# Altium PCB DC_AC_Inverter.PcbDoc (part 2 of 4)
Units mil, origin at the board's own origin, x right, y up, seen from the top; angles counter-clockwise.
Board outline 6496.06 x 4566.93 mil, 6 copper layers (L1, L2, L3, L4, L5, L6), stack 22.312 mil thick; 133 components, 65 nets, 349 pads, 134 vias.
Unrouted connection lines stored in the file: 226.
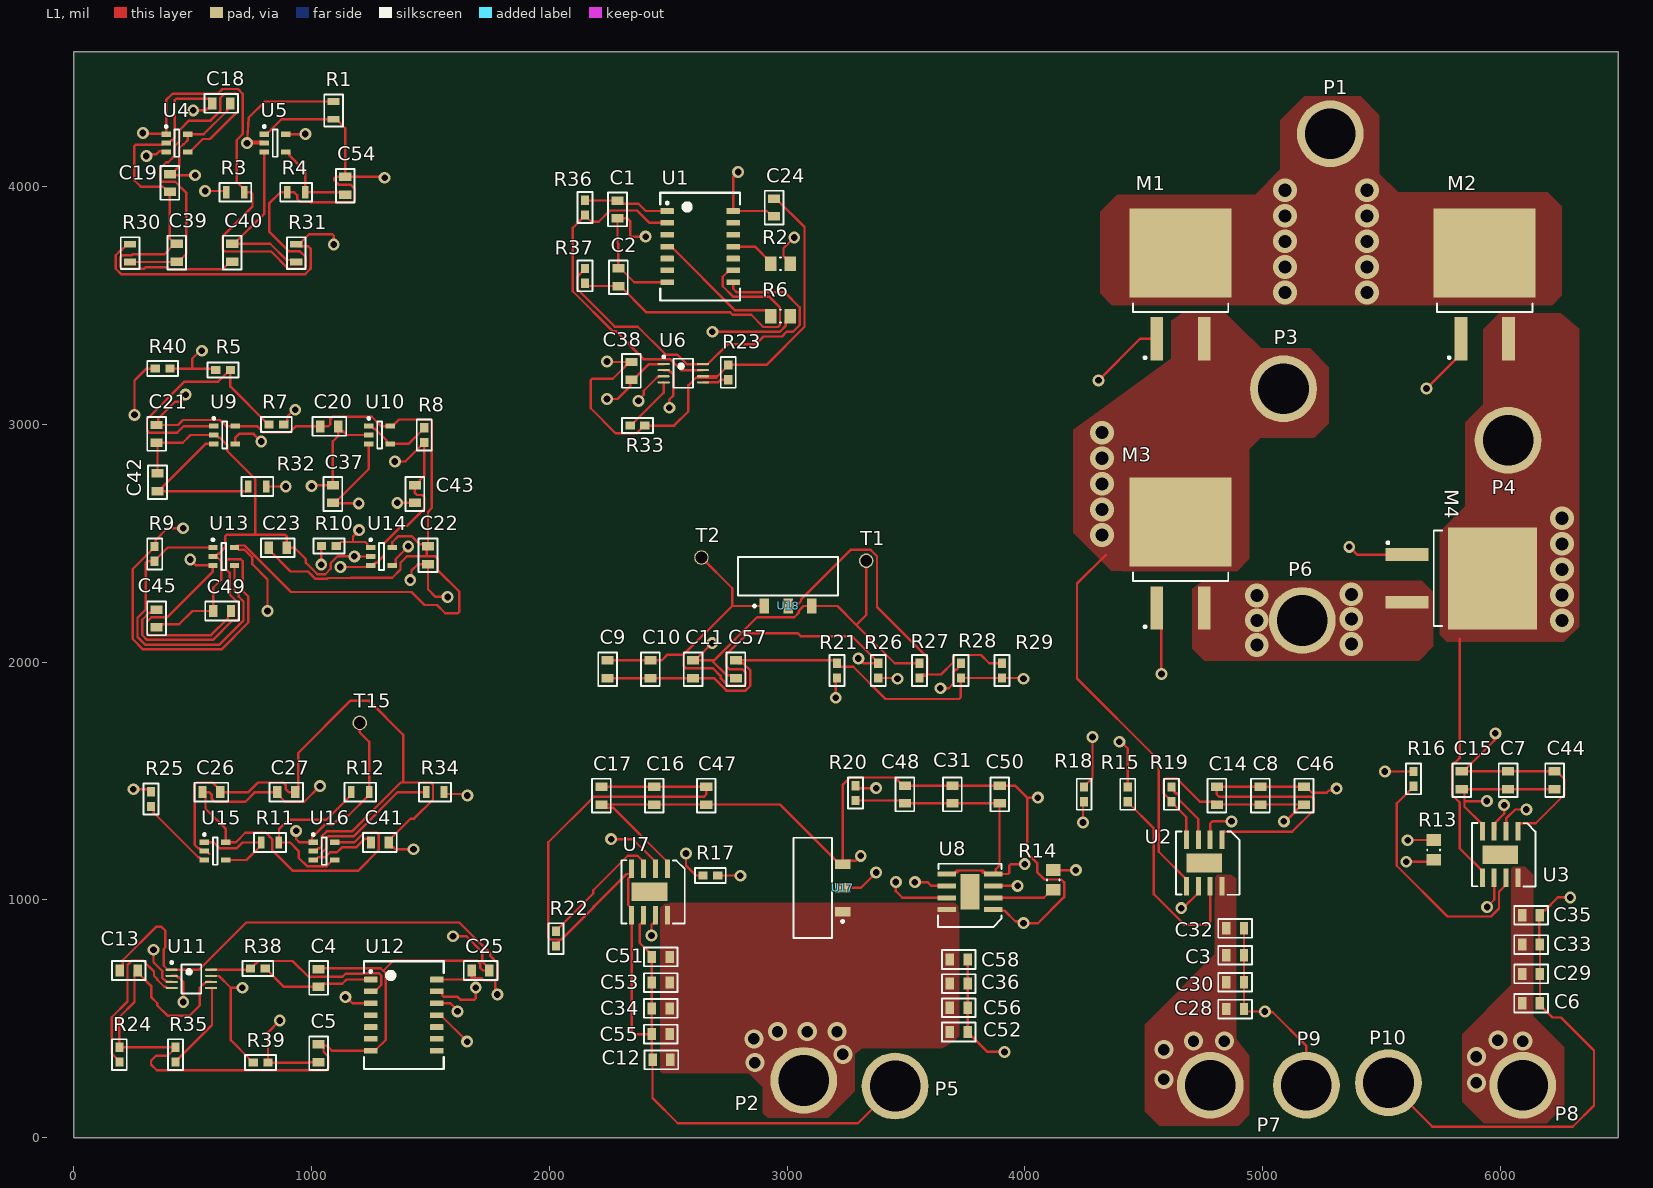
[diagram p0: L1 view]

## Part data (continued)
C10 C12 C57: library part CL10A106MA8NRNC, "25V 10uF X5R ±20% 0603 Multilayer Ceramic Capacitors MLCC - SMD/SMT ROHS", Case Code (Imperial)=0603, Case Code (Metric)=1608, Dielectric=X5R, Dielectric Material=Ceramic, Manufacturer="Samsung Electro-Mechanics", Max Operating Temperature=85°C, Min Operating Temperature=-55°C, Supplier Part Number=1276-1869-1-ND, Tolerance=20%, Voltage Rating=25V, Case/Package=0603, Category="Ceramic Capacitors", China RoHS=Compliant, ComponentLink1Description=https://datasheet.octopart.com:443/CL10A106MA8NRNC-Samsung-Electro-Mechanics-datasheet-182019172.pdf?src-supplier=IHS, ComponentLink1URL=https://datasheet.octopart.com:443/CL10A106MA8NRNC-Samsung-Electro-Mechanics-datasheet-182019172.pdf?src-supplier=IHS, ComponentLink2Description=https://datasheet.octopart.com:443/CL10A106MA8NRNC-Samsung-Electro-Mechanics-datasheet-137745063.pdf?src-supplier=Future+Electronics, ComponentLink2URL=https://datasheet.octopart.com:443/CL10A106MA8NRNC-Samsung-Electro-Mechanics-datasheet-137745063.pdf?src-supplier=Future+Electronics, ComponentLink3Description=https://datasheet.octopart.com:443/CL10A106MA8NRNC-Samsung-Electro-Mechanics-datasheet-136031756.pdf?src-supplier=Future+Electronics, ComponentLink3URL=https://datasheet.octopart.com:443/CL10A106MA8NRNC-Samsung-Electro-Mechanics-datasheet-136031756.pdf?src-supplier=Future+Electronics, ComponentLink4Description=https://datasheet.octopart.com:443/CL10A106MA8NRNC-Samsung-Electro-Mechanics-datasheet-110226291.pdf?src-supplier=Future+Electronics, ComponentLink4URL=https://datasheet.octopart.com:443/CL10A106MA8NRNC-Samsung-Electro-Mechanics-datasheet-110226291.pdf?src-supplier=Future+Electronics, ComponentLink5Description=https://datasheet.octopart.com:443/CL10A106MA8NRNC-Samsung-Electro-Mechanics-datasheet-87580073.pdf?src-supplier=Future+Electronics, ComponentLink5URL=https://datasheet.octopart.com:443/CL10A106MA8NRNC-Samsung-Electro-Mechanics-datasheet-87580073.pdf?src-supplier=Future+Electronics, ComponentLink6Description=https://datasheet.octopart.com:443/CL10A106MA8NRNC-Samsung-Electro-Mechanics-datasheet-68300265.pdf?src-supplier=Future+Electronics, ComponentLink6URL=https://datasheet.octopart.com:443/CL10A106MA8NRNC-Samsung-Electro-Mechanics-datasheet-68300265.pdf?src-supplier=Future+Electronics, ComponentLink7Description=https://datasheet.octopart.com:443/CL10A106MA8NRNC-Samsung-datasheet-66660282.pdf?src-supplier=Future+Electronics, ComponentLink7URL=https://datasheet.octopart.com:443/CL10A106MA8NRNC-Samsung-datasheet-66660282.pdf?src-supplier=Future+Electronics, ComponentLink8Description=https://datasheet.octopart.com:443/CL10A106MA8NRNC-Samsung-datasheet-48647236.pdf?src-supplier=Future+Electronics, ComponentLink8URL=https://datasheet.octopart.com:443/CL10A106MA8NRNC-Samsung-datasheet-48647236.pdf?src-supplier=Future+Electronics, ComponentLink9Description=https://datasheet.octopart.com:443/CL10A106MA8NRNC-Samsung-datasheet-39118733.pdf?src-supplier=Future+Electronics, ComponentLink9URL=https://datasheet.octopart.com:443/CL10A106MA8NRNC-Samsung-datasheet-39118733.pdf?src-supplier=Future+Electronics, ComponentLink10Description=https://datasheet.octopart.com:443/CL10A106MA8NRNC-Samsung-Electro-Mechanics-datasheet-149156483.pdf?src-supplier=Future+Electronics, ComponentLink10URL=https://datasheet.octopart.com:443/CL10A106MA8NRNC-Samsung-Electro-Mechanics-datasheet-149156483.pdf?src-supplier=Future+Electronics, Contact Plating=Tin, Country of Origin="Mainland China, Philippines, South Korea", Export Control Classification Number (ECCN) Code=EAR99, Harmonized Tariff Schedule (HTS) Code=8532.24.00.20, Height=800µm, Introduction Date=2013-01-16, Lead Free="Lead Free", Length=1.6mm, Lifecycle Status=Production, Manufacturer Part Number=CL10A106MA8NRNC, Material=Ceramic, Mounting Technology="Surface Mount", Number of Terminals=2, Packaging="Tape & Reel (TR)", Pricing="1=0.09, 10=0.045 (USD)", REACH SVHC=Yes, RoHS=Compliant, Schedule B="8532240020, 8532240020|8532240020|8532240020|8532240020|8532240020|8532240020|8532240020|8532240020|8532240020|8532240020|8532240020, 8532240020|8532240020|8532240020|8532240020|8532240020|8532240020|8532240020|8532240020|8532240020|8532240020|8532240020|8532240020, 8532240020|8532240020|8532240020|8532240020|8532240020|8532240020|8532240020|8532240020|8532240020|8532240020|8532240020|8532240020|8532240020", Stock=819895, Supplier=DigiKey, Termination=Wraparound, Thickness=889µm, Voltage Rating (DC)=25V, Width=800µm
C13 C18 C19 C20 C21 C22 C23 C24 C25 C26 C27 C38: library part GRM155R71C103KA01D, "16V 10nF X7R ±10% 0402 Multilayer Ceramic Capacitors MLCC - SMD/SMT ROHS", Case Code (Imperial)=0402, Case Code (Metric)=1005, Dielectric=X7R, Dielectric Material=Ceramic, Manufacturer=Murata, Manufacturer Lifecycle Status=NRND, Max Operating Temperature=125°C, Min Operating Temperature=-55°C, Supplier Part Number=490-1313-2-ND, Tolerance=10%, Voltage=16V, Case/Package=0402, Category="Ceramic Capacitors", ComponentLink1Description=https://datasheet.octopart.com:443/GRM155R71C103KA01D-Murata-datasheet-8817987.pdf?src-supplier=element14+APAC, ComponentLink1URL=https://datasheet.octopart.com:443/GRM155R71C103KA01D-Murata-datasheet-8817987.pdf?src-supplier=element14+APAC, ComponentLink2Description=https://datasheet.octopart.com:443/GRM155R71C103KA01D-Murata-datasheet-62317116.pdf?src-supplier=element14+APAC, ComponentLink2URL=https://datasheet.octopart.com:443/GRM155R71C103KA01D-Murata-datasheet-62317116.pdf?src-supplier=element14+APAC, ComponentLink3Description=https://datasheet.octopart.com:443/GRM155R71C103KA01D-Murata-datasheet-12547956.pdf?src-supplier=_legacy+Avnet, ComponentLink3URL=https://datasheet.octopart.com:443/GRM155R71C103KA01D-Murata-datasheet-12547956.pdf?src-supplier=_legacy+Avnet, ComponentLink4Description=https://datasheet.octopart.com:443/GRM155R71C103KA01D-Murata-datasheet-8330587.pdf?src-supplier=_legacy+Avnet, ComponentLink4URL=https://datasheet.octopart.com:443/GRM155R71C103KA01D-Murata-datasheet-8330587.pdf?src-supplier=_legacy+Avnet, ComponentLink5Description=https://datasheet.octopart.com:443/GRM155R71C103KA01D-Murata-datasheet-165579666.pdf?src-supplier=TME, ComponentLink5URL=https://datasheet.octopart.com:443/GRM155R71C103KA01D-Murata-datasheet-165579666.pdf?src-supplier=TME, ComponentLink6Description=https://datasheet.octopart.com:443/GRM155R71C103KA01D-Murata-datasheet-59876780.pdf?src-supplier=TME, ComponentLink6URL=https://datasheet.octopart.com:443/GRM155R71C103KA01D-Murata-datasheet-59876780.pdf?src-supplier=TME, ComponentLink7Description=https://datasheet.octopart.com:443/GRM155R71C103KA01D-Murata-datasheet-141266224.pdf?src-supplier=Ciiva, ComponentLink7URL=https://datasheet.octopart.com:443/GRM155R71C103KA01D-Murata-datasheet-141266224.pdf?src-supplier=Ciiva, ComponentLink8Description=https://datasheet.octopart.com:443/GRM155R71C103KA01D-Murata-datasheet-140690969.pdf?src-supplier=Ciiva, ComponentLink8URL=https://datasheet.octopart.com:443/GRM155R71C103KA01D-Murata-datasheet-140690969.pdf?src-supplier=Ciiva, ComponentLink9Description=https://datasheet.octopart.com:443/GRM155R71C103KA01D-Murata-datasheet-138740887.pdf?src-supplier=Ciiva, ComponentLink9URL=https://datasheet.octopart.com:443/GRM155R71C103KA01D-Murata-datasheet-138740887.pdf?src-supplier=Ciiva, ComponentLink10Description=https://datasheet.octopart.com:443/GRM155R71C103KA01D-Murata-datasheet-22122223.pdf?src-supplier=Future+Electronics, ComponentLink10URL=https://datasheet.octopart.com:443/GRM155R71C103KA01D-Murata-datasheet-22122223.pdf?src-supplier=Future+Electronics, ComponentLink11Description=https://datasheet.octopart.com:443/GRM155R71C103KA01D-Murata-datasheet-14400559.pdf?src-supplier=Future+Electronics, ComponentLink11URL=https://datasheet.octopart.com:443/GRM155R71C103KA01D-Murata-datasheet-14400559.pdf?src-supplier=Future+Electronics, ComponentLink12Description=https://datasheet.octopart.com:443/GRM155R71C103KA01D-Murata-datasheet-44106282.pdf?src-supplier=Future+Electronics, ComponentLink12URL=https://datasheet.octopart.com:443/GRM155R71C103KA01D-Murata-datasheet-44106282.pdf?src-supplier=Future+Electronics, ComponentLink13Description=https://datasheet.octopart.com/GRM155R71C103KA01D-Murata-datasheet-12515295.pdf, ComponentLink13URL=https://datasheet.octopart.com/GRM155R71C103KA01D-Murata-datasheet-12515295.pdf, ComponentLink14Description=https://datasheet.octopart.com/GRM155R71C103KA01D-Murata-datasheet-12510076.pdf, ComponentLink14URL=https://datasheet.octopart.com/GRM155R71C103KA01D-Murata-datasheet-12510076.pdf, ComponentLink15Description=https://datasheet.octopart.com/GRM155R71C103KA01D-Murata-datasheet-11978611.pdf, ComponentLink15URL=https://datasheet.octopart.com/GRM155R71C103KA01D-Murata-datasheet-11978611.pdf, ComponentLink16Description=https://datasheet.octopart.com/GRM155R71C103KA01D-Murata-datasheet-10025737.pdf, ComponentLink16URL=https://datasheet.octopart.com/GRM155R71C103KA01D-Murata-datasheet-10025737.pdf, ComponentLink17Description=https://datasheet.octopart.com/GRM155R71C103KA01D-Murata-datasheet-8819587.pdf, ComponentLink17URL=https://datasheet.octopart.com/GRM155R71C103KA01D-Murata-datasheet-8819587.pdf, ComponentLink18Description=https://datasheet.octopart.com/GRM155R71C103KA01D-Murata-datasheet-14400564.pdf, ComponentLink18URL=https://datasheet.octopart.com/GRM155R71C103KA01D-Murata-datasheet-14400564.pdf, ComponentLink19Description=https://datasheet.octopart.com:443/GRM155R71C103KA01D-Murata-datasheet-148211.pdf?src-supplier=Garrett, ComponentLink19URL=https://datasheet.octopart.com:443/GRM155R71C103KA01D-Murata-datasheet-148211.pdf?src-supplier=Garrett, ComponentLink20Description=https://datasheet.octopart.com:443/GRM155R71C103KA01D-Murata-datasheet-102.pdf?src-supplier=DigiKey, ComponentLink20URL=https://datasheet.octopart.com:443/GRM155R71C103KA01D-Murata-datasheet-102.pdf?src-supplier=DigiKey, ComponentLink21Description=http://sigma.octopart.com:80/reach_statement/Murata-company-16.pdf?src-supplier=Compliance+Statements, ComponentLink21URL=http://sigma.octopart.com:80/reach_statement/Murata-company-16.pdf?src-supplier=Compliance+Statements, Depth=500µm, Height=500µm, Lead Free="Lead Free", Length=1mm, Lifecycle Status=NRND, Manufacturer Part Number=GRM155R71C103KA01D, Material=Ceramic, Mounting Technology="Surface Mount", Number of Terminals=2, Packaging="Cut Tape", Pins=2, Pricing="10000=0.00545, 20000=0.00494, 30000=0.00468, 50000=0.00439, 70000=0.00423, 100000=0.00407, 120000=0.00399, 240000=0.00374, 250000=0.00372 (USD)", Radiation Hardening=No, REACH SVHC=Yes, RoHS=Compliant, Schedule B="8532240020, 8532240020|8532240020, 8532240020|8532240020|8532240020, 8532240020|8532240020|8532240020|8532240020", Stock=6720000, Supplier=DigiKey, Termination=SMD/SMT, Thickness=500µm, Voltage Rating=16V, Voltage Rating (DC)=16V, Width=500µm
C30 C33 C53 C56: library part C0603C683K5RACTU, "Ceramic Capacitor, Multilayer, Ceramic, 50V, 10% +Tol, 10% -Tol, X7R, 15% TC, 0.068uF, Surface Mount, 0603", Case Code (Imperial)=0603, Case Code (Metric)=1608, Dielectric=X7R, Dielectric Material=Ceramic, Manufacturer=KEMET, Max Operating Temperature=125°C, Min Operating Temperature=-55°C, Supplier Part Number=399-C0603C683K5RACTUCT-ND, Temperature Coefficient=30ppm/°C, Tolerance=10%, Voltage=50V, Case/Package=0603, Category="Ceramic Capacitors", China RoHS=Compliant, ComponentLink1Description=https://datasheet.octopart.com:443/C0603C683K5RACTU-KEMET-datasheet-178445679.pdf?src-supplier=IHS, ComponentLink1URL=https://datasheet.octopart.com:443/C0603C683K5RACTU-KEMET-datasheet-178445679.pdf?src-supplier=IHS, ComponentLink2Description=https://datasheet.octopart.com:443/C0603C683K5RAC7867-KEMET-datasheet-184792974.pdf?src-supplier=IHS, ComponentLink2URL=https://datasheet.octopart.com:443/C0603C683K5RAC7867-KEMET-datasheet-184792974.pdf?src-supplier=IHS, ComponentLink3Description=https://datasheet.octopart.com:443/C0603C683K5RACTU-KEMET-datasheet-137357759.pdf?src-supplier=Farnell, ComponentLink3URL=https://datasheet.octopart.com:443/C0603C683K5RACTU-KEMET-datasheet-137357759.pdf?src-supplier=Farnell, ComponentLink4Description=https://datasheet.octopart.com:443/C0603C683K5RACTU-KEMET-datasheet-101575963.pdf?src-supplier=Farnell, ComponentLink4URL=https://datasheet.octopart.com:443/C0603C683K5RACTU-KEMET-datasheet-101575963.pdf?src-supplier=Farnell, ComponentLink5Description=https://datasheet.octopart.com:443/C0603C683K5RACTU-KEMET-datasheet-176142257.pdf?src-supplier=Farnell, ComponentLink5URL=https://datasheet.octopart.com:443/C0603C683K5RACTU-KEMET-datasheet-176142257.pdf?src-supplier=Farnell, ComponentLink6Description=https://datasheet.octopart.com:443/C0603C683K5RACTU-Kemet-datasheet-500041.pdf?src-supplier=Farnell, ComponentLink6URL=https://datasheet.octopart.com:443/C0603C683K5RACTU-Kemet-datasheet-500041.pdf?src-supplier=Farnell, ComponentLink7Description=https://datasheet.octopart.com:443/C0603C683K5RACTU-KEMET-datasheet-137357764.pdf?src-supplier=Upverter, ComponentLink7URL=https://datasheet.octopart.com:443/C0603C683K5RACTU-KEMET-datasheet-137357764.pdf?src-supplier=Upverter, ComponentLink8Description=https://datasheet.octopart.com:443/C0603C683K5RACTU-KEMET-datasheet-157246124.pdf?src-supplier=Electro+Sonic, ComponentLink8URL=https://datasheet.octopart.com:443/C0603C683K5RACTU-KEMET-datasheet-157246124.pdf?src-supplier=Electro+Sonic, ComponentLink9Description=https://datasheet.octopart.com:443/C0603C683K5RACTU-KEMET-datasheet-32036385.pdf?src-supplier=Electro+Sonic, ComponentLink9URL=https://datasheet.octopart.com:443/C0603C683K5RACTU-KEMET-datasheet-32036385.pdf?src-supplier=Electro+Sonic, ComponentLink10Description=https://datasheet.octopart.com:443/C0603C683K5RACTU-KEMET-datasheet-178088105.pdf?src-supplier=Newark, ComponentLink10URL=https://datasheet.octopart.com:443/C0603C683K5RACTU-KEMET-datasheet-178088105.pdf?src-supplier=Newark, ComponentLink11Description=https://datasheet.octopart.com:443/C0603C683K5RACTU-KEMET-datasheet-130256537.pdf?src-supplier=Newark, ComponentLink11URL=https://datasheet.octopart.com:443/C0603C683K5RACTU-KEMET-datasheet-130256537.pdf?src-supplier=Newark, ComponentLink12Description=https://datasheet.octopart.com:443/C0603C683K5RACTU-Kemet-datasheet-27203261.pdf?src-supplier=Newark, ComponentLink12URL=https://datasheet.octopart.com:443/C0603C683K5RACTU-Kemet-datasheet-27203261.pdf?src-supplier=Newark, ComponentLink13Description=https://datasheet.octopart.com:443/C0603C683K5RACTU-Kemet-datasheet-12608295.pdf?src-supplier=Newark, ComponentLink13URL=https://datasheet.octopart.com:443/C0603C683K5RACTU-Kemet-datasheet-12608295.pdf?src-supplier=Newark, ComponentLink14Description=https://datasheet.octopart.com:443/C0603C683K5RACTU-Kemet-datasheet-11992184.pdf?src-supplier=Newark, ComponentLink14URL=https://datasheet.octopart.com:443/C0603C683K5RACTU-Kemet-datasheet-11992184.pdf?src-supplier=Newark, ComponentLink15Description=https://datasheet.octopart.com:443/C0603C683K5RACTU-Kemet-datasheet-10942409.pdf?src-supplier=Newark, ComponentLink15URL=https://datasheet.octopart.com:443/C0603C683K5RACTU-Kemet-datasheet-10942409.pdf?src-supplier=Newark, ComponentLink16Description=https://datasheet.octopart.com:443/C0603C683K5RACTU-Kemet-datasheet-10404442.pdf?src-supplier=Newark, ComponentLink16URL=https://datasheet.octopart.com:443/C0603C683K5RACTU-Kemet-datasheet-10404442.pdf?src-supplier=Newark, ComponentLink17Description=https://datasheet.octopart.com:443/C0603C683K5RACTU-KEMET-datasheet-164512540.pdf?src-supplier=TME, ComponentLink17URL=https://datasheet.octopart.com:443/C0603C683K5RACTU-KEMET-datasheet-164512540.pdf?src-supplier=TME, ComponentLink18Description=https://datasheet.octopart.com:443/C0603C683K5RACTU-KEMET-datasheet-68304558.pdf?src-supplier=TME, ComponentLink18URL=https://datasheet.octopart.com:443/C0603C683K5RACTU-KEMET-datasheet-68304558.pdf?src-supplier=TME, ComponentLink19Description=https://datasheet.octopart.com:443/C0603C683K5RACTU-KEMET-datasheet-68331906.pdf?src-supplier=TME, ComponentLink19URL=https://datasheet.octopart.com:443/C0603C683K5RACTU-KEMET-datasheet-68331906.pdf?src-supplier=TME, ComponentLink20Description=https://datasheet.octopart.com:443/C0603C683K5RACTU-KEMET-datasheet-110724412.pdf?src-supplier=RS+(Formerly+Allied+Electronics), ComponentLink20URL=https://datasheet.octopart.com:443/C0603C683K5RACTU-KEMET-datasheet-110724412.pdf?src-supplier=RS+(Formerly+Allied+Electronics), ComponentLink21Description=https://datasheet.octopart.com:443/C0603C683K5RACTU-Kemet-datasheet-60243841.pdf?src-supplier=RS+(Formerly+Allied+Electronics), ComponentLink21URL=https://datasheet.octopart.com:443/C0603C683K5RACTU-Kemet-datasheet-60243841.pdf?src-supplier=RS+(Formerly+Allied+Electronics), ComponentLink22Description=https://datasheet.octopart.com/C0603C683K5RACTU-KEMET-datasheet-84169754.pdf, ComponentLink22URL=https://datasheet.octopart.com/C0603C683K5RACTU-KEMET-datasheet-84169754.pdf, ComponentLink23Description=https://datasheet.octopart.com:443/C0603C683K5RACTU-Kemet-datasheet-24570007.pdf?src-supplier=element14+APAC, ComponentLink23URL=https://datasheet.octopart.com:443/C0603C683K5RACTU-Kemet-datasheet-24570007.pdf?src-supplier=element14+APAC, ComponentLink24Description=https://datasheet.octopart.com:443/C0603C683K5RACTU-Kemet-datasheet-22084244.pdf?src-supplier=element14+APAC, ComponentLink24URL=https://datasheet.octopart.com:443/C0603C683K5RACTU-Kemet-datasheet-22084244.pdf?src-supplier=element14+APAC, ComponentLink25Description=https://datasheet.octopart.com:443/C0603C683K5RACTU-Kemet-datasheet-11790453.pdf?src-supplier=Arrow+Electronics, ComponentLink25URL=https://datasheet.octopart.com:443/C0603C683K5RACTU-Kemet-datasheet-11790453.pdf?src-supplier=Arrow+Electronics, ComponentLink26Description=https://datasheet.octopart.com:443/C0603C683K5RAC7867-KEMET-datasheet-164857143.pdf?src-supplier=Burklin+Elektronik, ComponentLink26URL=https://datasheet.octopart.com:443/C0603C683K5RAC7867-KEMET-datasheet-164857143.pdf?src-supplier=Burklin+Elektronik, Country of Origin=Mexico, Depth=800µm, Dissipation Factor=2.5%, Export Control Classification Number (ECCN) Code=EAR99, Harmonized Tariff Schedule (HTS) Code=8532.24.00.20, Height=800µm, Introduction Date=2008-01-10, Lead Pitch=700µm, Length=1.6mm, Lifecycle Status=Production, Manufacturer Part Number=C0603C683K5RACTU, Material=Ceramic, Mounting Technology="Surface Mount", Number of Terminals=2, Packaging="Cut Tape", Pins=2, Pricing="1=0.1, 10=0.054, 50=0.0374, 100=0.0323, 500=0.0237, 1000=0.02004 (USD)", Radiation Hardening=No, REACH SVHC=Yes, RoHS=Compliant, Schedule B="8532240020, 8532240020|8532240020, 8532240020|8532240020|8532240020, 8532240020|8532240020|8532240020|8532240020", Stock=75691, Supplier=DigiKey, Termination=SMD/SMT, Thickness=863.6µm, Voltage Rating=50V, Voltage Rating (AC)=50V, Voltage Rating (DC)=50V, Width=800µm
C32 C35 C55 C58: library part GRM188C61E226ME01J, "Ceramic Capacitor, Multilayer, Ceramic, 25V, 20% +Tol, 20% -Tol, X5S, 22% TC, 22uF, Surface Mount, 0603", Case/Package=0603, Dielectric=X5S, Dielectric Material=Ceramic, Manufacturer=Murata, Max Operating Temperature=85°C, Min Operating Temperature=-55°C, Supplier Part Number=490-GRM188C61E226ME01JDKR-ND, Tolerance=20%, Voltage Rating=25V, Category="Ceramic Capacitors", ComponentLink1Description=https://datasheet.octopart.com/GRM188C61E226ME01J-Murata-datasheet-12515295.pdf, ComponentLink1URL=https://datasheet.octopart.com/GRM188C61E226ME01J-Murata-datasheet-12515295.pdf, ComponentLink2Description=https://datasheet.octopart.com/GRM188C61E226ME01J-Murata-datasheet-12510076.pdf, ComponentLink2URL=https://datasheet.octopart.com/GRM188C61E226ME01J-Murata-datasheet-12510076.pdf, ComponentLink3Description=https://datasheet.octopart.com/GRM188C61E226ME01J-Murata-datasheet-11978611.pdf, ComponentLink3URL=https://datasheet.octopart.com/GRM188C61E226ME01J-Murata-datasheet-11978611.pdf, ComponentLink4Description=https://datasheet.octopart.com/GRM188C61E226ME01J-Murata-datasheet-10025737.pdf, ComponentLink4URL=https://datasheet.octopart.com/GRM188C61E226ME01J-Murata-datasheet-10025737.pdf, ComponentLink5Description=https://datasheet.octopart.com/GRM188C61E226ME01J-Murata-datasheet-8819587.pdf, ComponentLink5URL=https://datasheet.octopart.com/GRM188C61E226ME01J-Murata-datasheet-8819587.pdf, ComponentLink6Description=http://sigma.octopart.com:80/reach_statement/Murata-company-16.pdf?src-supplier=Compliance+Statements, ComponentLink6URL=http://sigma.octopart.com:80/reach_statement/Murata-company-16.pdf?src-supplier=Compliance+Statements, Export Control Classification Number (ECCN) Code=EAR99, Harmonized Tariff Schedule (HTS) Code=8532.24.00.20, Height=800µm, Introduction Date=2024-04-22, Length=1.6mm, Lifecycle Status=Production, Manufacturer Part Number=GRM188C61E226ME01J, Material=Ceramic, Mounting Technology="Surface Mount", Number of Terminals=2, Pricing="1=0.41, 10=0.244, 50=0.181, 100=0.1615, 500=0.12866, 1000=0.11854, 2500=0.10786, 5000=0.10143 (USD)", REACH SVHC=Yes, RoHS=Compliant, Stock=20437, Supplier=DigiKey, Thickness=800µm, Voltage Rating (DC)=25V, Width=800µm
C54: library part GCM1885C1H392JA16D, "0603 3.9 nF 50 V ±5 % Tolerance C0G SMT Multilayer Ceramic Capacitor", Case Code (Imperial)=0603, Case Code (Metric)=1608, Dielectric=C0G, Dielectric Material=Ceramic, Manufacturer=Murata, Manufacturer Lifecycle Status="IN PRODUCTION", Max Operating Temperature=125°C, Min Operating Temperature=-55°C, Ratings=AEC-Q200, Supplier Part Number=490-11958-1-ND, Temperature Coefficient=30ppm/°C, Tolerance=5%, Voltage Rating=50V, Case/Package=0603, Category="Ceramic Capacitors", ComponentLink1Description=https://datasheet.octopart.com:443/GCM1885C1H392JA16D-Murata-datasheet-149522577.pdf?src-supplier=Newark, ComponentLink1URL=https://datasheet.octopart.com:443/GCM1885C1H392JA16D-Murata-datasheet-149522577.pdf?src-supplier=Newark, ComponentLink2Description=https://datasheet.octopart.com:443/GCM1885C1H392JA16D-Murata-datasheet-141266224.pdf?src-supplier=Ciiva, ComponentLink2URL=https://datasheet.octopart.com:443/GCM1885C1H392JA16D-Murata-datasheet-141266224.pdf?src-supplier=Ciiva, ComponentLink3Description=https://datasheet.octopart.com:443/GCM1885C1H392JA16D-Murata-datasheet-140657019.pdf?src-supplier=Ciiva, ComponentLink3URL=https://datasheet.octopart.com:443/GCM1885C1H392JA16D-Murata-datasheet-140657019.pdf?src-supplier=Ciiva, ComponentLink4Description=https://datasheet.octopart.com:443/GCM1885C1H392JA16D-Murata-datasheet-138716719.pdf?src-supplier=Ciiva, ComponentLink4URL=https://datasheet.octopart.com:443/GCM1885C1H392JA16D-Murata-datasheet-138716719.pdf?src-supplier=Ciiva, ComponentLink5Description=https://datasheet.octopart.com:443/GCM1885C1H392JA16D-Murata-datasheet-142295892.pdf?src-supplier=Arrow.cn, ComponentLink5URL=https://datasheet.octopart.com:443/GCM1885C1H392JA16D-Murata-datasheet-142295892.pdf?src-supplier=Arrow.cn, ComponentLink6Description=https://datasheet.octopart.com:443/GCM1885C1H392JA16D-Murata-datasheet-12532847.pdf?src-supplier=Future+Electronics, ComponentLink6URL=https://datasheet.octopart.com:443/GCM1885C1H392JA16D-Murata-datasheet-12532847.pdf?src-supplier=Future+Electronics, ComponentLink7Description=https://datasheet.octopart.com:443/GCM1885C1H392JA16D-Murata-datasheet-44781017.pdf?src-supplier=Future+Electronics, ComponentLink7URL=https://datasheet.octopart.com:443/GCM1885C1H392JA16D-Murata-datasheet-44781017.pdf?src-supplier=Future+Electronics, ComponentLink8Description=https://datasheet.octopart.com:443/GCM1885C1H392JA16D-Murata-datasheet-12511495.pdf?src-supplier=TME, ComponentLink8URL=https://datasheet.octopart.com:443/GCM1885C1H392JA16D-Murata-datasheet-12511495.pdf?src-supplier=TME, ComponentLink9Description=http://sigma.octopart.com:80/reach_statement/Murata-company-16.pdf?src-supplier=Compliance+Statements, ComponentLink9URL=http://sigma.octopart.com:80/reach_statement/Murata-company-16.pdf?src-supplier=Compliance+Statements, Depth=800µm, Export Control Classification Number (ECCN) Code=EAR99, Harmonized Tariff Schedule (HTS) Code=8532.24.00.20, Height=800µm, Introduction Date=2010-10-29, Lead Free="Lead Free", Length=1.6mm, Lifecycle Status=Production, Manufacturer Part Number=GCM1885C1H392JA16D, Material=Ceramic, Mounting Technology="Surface Mount", Number of Terminals=2, Packaging="Tape and Reel", Pricing="1=0.1, 10=0.046, 50=0.0314, 100=0.027, 500=0.01964, 1000=0.01737 (USD)", REACH SVHC=Yes, RoHS=Compliant, Schedule B="8532240020, 8532240020|8532240020, 8532240020|8532240020|8532240020, 8532240020|8532240020|8532240020|8532240020", Stock=87384, Supplier=DigiKey, Termination=SMD/SMT, Voltage Rating (DC)=50V, Weight=6.293594mg, Width=800µm
M1 M2 M3 M4: library part IPB068N20NM6ATMA1, "Trans MOSFET N-CH 200V 15.4A 3-Pin(2+Tab) D2PAK T/R", Manufacturer=Infineon, Supplier Part Number=448-IPB068N20NM6ATMA1CT-ND, Category=MOSFETs, ComponentLink1Description=https://datasheet.octopart.com:443/IPB068N20NM6ATMA1-Infineon-datasheet-188885164.pdf?src-supplier=TME, ComponentLink1URL=https://datasheet.octopart.com:443/IPB068N20NM6ATMA1-Infineon-datasheet-188885164.pdf?src-supplier=TME, ComponentLink2Description=http://sigma.octopart.com:80/conflict_mineral_statement/Infineon-company-51.pdf?src-supplier=Compliance+Statements, ComponentLink2URL=http://sigma.octopart.com:80/conflict_mineral_statement/Infineon-company-51.pdf?src-supplier=Compliance+Statements, Lifecycle Status=Production, Manufacturer Part Number=IPB068N20NM6ATMA1, Pricing="1=8.02, 10=5.45, 100=4.2066 (USD)", REACH SVHC=Yes, RoHS=Compliant, Stock=4020, Supplier=DigiKey
P1 P2 P3 P4 P5 P6 P7 P8 P9 P10: library part PEMs, "PEM: / SMTSOB-632-4ET"
R1 R3 R4 R11 R12 R30 R31 R32 R34: library part Y116910K0000T9R, "Res Metal Foil 2917 10K Ohm 0.01% 3/5W 2ppm/C Molded SMD T/R - Custom Tape W/Lea", Case/Package=Molded, Manufacturer="VPG Foil Resistors", Max Operating Temperature=175°C, Min Operating Temperature=-55°C, Power Dissipation=300mW, Power Rating=600mW, Supplier Part Number=Y1169-10KCT-ND, Temperature Coefficient=2ppm/°C, Tolerance=0.01%, Voltage Rating=300V, Working Voltage=180V, Category="Chip SMD Resistors", China RoHS=Compliant, ComponentLink1Description=https://datasheet.octopart.com:443/Y116910K0000T9R-VPG-Foil-Resistors-datasheet-41195406.pdf?src-supplier=IHS, ComponentLink1URL=https://datasheet.octopart.com:443/Y116910K0000T9R-VPG-Foil-Resistors-datasheet-41195406.pdf?src-supplier=IHS, ComponentLink2Description=https://datasheet.octopart.com:443/Y116910K0000T9R-VPG-Foil-Resistors-datasheet-182187878.pdf?src-supplier=IHS, ComponentLink2URL=https://datasheet.octopart.com:443/Y116910K0000T9R-VPG-Foil-Resistors-datasheet-182187878.pdf?src-supplier=IHS, ComponentLink3Description=https://datasheet.octopart.com:443/Y116910K0000T9R-VPG-Foil-Resistors-datasheet-12518376.pdf?src-supplier=Factory+Futures, ComponentLink3URL=https://datasheet.octopart.com:443/Y116910K0000T9R-VPG-Foil-Resistors-datasheet-12518376.pdf?src-supplier=Factory+Futures, Composition="Metal Foil", Depth=4.32mm, Height=2.79mm, Length=7.29mm, Lifecycle Status=Production, Manufacturer Part Number=Y116910K0000T9R, Military Standard=MIL-PRF-55182, Mounting Technology="Surface Mount", Number of Terminals=2, Pricing="1=30.94, 10=22.172, 25=19.8044, 50=18.3232 (USD)", REACH SVHC=Yes, Rise Time=1ns, RoHS=Compliant, Stock=296, Supplier=DigiKey, Termination=J-Lead, Voltage Rating (AC)=300V, Voltage Rating (DC)=300V, Width=4.32mm
R2 R6 R13 R14: library part PNM0805E5001BST5, "Res Thin Film 0805 5K Ohm 0.1% 0.2W(1/5W) ±25ppm/C Sulfur Resistant Pad SMD Medical T/R", Case Code (Imperial)=0805, Case Code (Metric)=2012, Manufacturer=Vishay, Max Operating Temperature=150°C, Min Operating Temperature=-55°C, Power Dissipation=200mW, Supplier Part Number=PNM0805-5.0KBCT-ND, Temperature Coefficient=25ppm/°C, Tolerance=0.1%, Voltage Rating=100V, Case/Package=0805, Category="Chip SMD Resistors", ComponentLink1Description=https://datasheet.octopart.com:443/PNM0805E5001BST5-Vishay-datasheet-170667721.pdf?src-supplier=IHS, ComponentLink1URL=https://datasheet.octopart.com:443/PNM0805E5001BST5-Vishay-datasheet-170667721.pdf?src-supplier=IHS, ComponentLink2Description=https://datasheet.octopart.com:443/PNM0805E5001BST5-Vishay-datasheet-12549948.pdf?src-supplier=Factory+Futures, ComponentLink2URL=https://datasheet.octopart.com:443/PNM0805E5001BST5-Vishay-datasheet-12549948.pdf?src-supplier=Factory+Futures, ComponentLink3Description=https://datasheet.octopart.com:443/PNM0805E5001BST5-Vishay-datasheet-12534889.pdf?src-supplier=Factory+Futures, ComponentLink3URL=https://datasheet.octopart.com:443/PNM0805E5001BST5-Vishay-datasheet-12534889.pdf?src-supplier=Factory+Futures, ComponentLink4Description=https://datasheet.octopart.com:443/PNM0805E5001BST5-Vishay-datasheet-12521829.pdf?src-supplier=Factory+Futures, ComponentLink4URL=https://datasheet.octopart.com:443/PNM0805E5001BST5-Vishay-datasheet-12521829.pdf?src-supplier=Factory+Futures, ComponentLink5Description=https://datasheet.octopart.com:443/PNM0805E5001BST5-Vishay-datasheet-12520543.pdf?src-supplier=Factory+Futures, ComponentLink5URL=https://datasheet.octopart.com:443/PNM0805E5001BST5-Vishay-datasheet-12520543.pdf?src-supplier=Factory+Futures, ComponentLink6Description=https://datasheet.octopart.com:443/PNM0805E5001BST5-Vishay-datasheet-62321198.pdf?src-supplier=Farnell, ComponentLink6URL=https://datasheet.octopart.com:443/PNM0805E5001BST5-Vishay-datasheet-62321198.pdf?src-supplier=Farnell, ComponentLink7Description=https://datasheet.octopart.com:443/PNM0805E5001BST5-Vishay-datasheet-10025851.pdf?src-supplier=Newark, ComponentLink7URL=https://datasheet.octopart.com:443/PNM0805E5001BST5-Vishay-datasheet-10025851.pdf?src-supplier=Newark, ComponentLink8Description=http://sigma.octopart.com:80/rohs_statement/Vishay-company-15.pdf?src-supplier=Compliance+Statements, ComponentLink8URL=http://sigma.octopart.com:80/rohs_statement/Vishay-company-15.pdf?src-supplier=Compliance+Statements, Composition="Thin Film", Height=381µm, Length=2.032mm, Lifecycle Status=Production, Manufacturer Part Number=PNM0805E5001BST5, Mounting Technology="Surface Mount", Number of Terminals=2, Packaging="Cut Tape", Pins=2, Power Rating=200mW, Pricing="1=0.78, 10=0.647, 25=0.5996, 50=0.5668, 100=0.5274, 250=0.50048 (USD)", Radiation Hardening=No, REACH SVHC=Yes, RoHS=Compliant, Schedule B="8533210045, 8533210045|8533210045|8533210045|8533210045|8533210045", Stock=3988, Supplier=DigiKey, Voltage Rating (DC)=100V, Width=1.27mm, Working Voltage=100V
R5: library part RC0402FR-072M2L, "62.5mW Thick Film Resistors 50V ±100ppm/℃ ±1% 2.2MΩ 0402 Chip Resistor - Surface Mount ROHS", Case Code (Imperial)=0402, Case Code (Metric)=1005, Manufacturer="Yageo Group", Max Operating Temperature=155°C, Max Power Dissipation=63mW, Min Operating Temperature=-55°C, Power Dissipation=62.5mW, Supplier Part Number=13-RC0402FR-072M2LCT-ND, Temperature Coefficient=100ppm/°C, Tolerance=1%, Voltage Rating=50V, Case/Package=0402, Category="Chip SMD Resistors", China RoHS=Non-Compliant, ComponentLink1Description=https://datasheet.octopart.com:443/RC0402FR-072M2L-Yageo-datasheet-175887523.pdf?src-supplier=Newark, ComponentLink1URL=https://datasheet.octopart.com:443/RC0402FR-072M2L-Yageo-datasheet-175887523.pdf?src-supplier=Newark, ComponentLink2Description=https://datasheet.octopart.com:443/RC0402FR-072M2L-Yageo-datasheet-8324527.pdf?src-supplier=Newark, ComponentLink2URL=https://datasheet.octopart.com:443/RC0402FR-072M2L-Yageo-datasheet-8324527.pdf?src-supplier=Newark, ComponentLink3Description=https://datasheet.octopart.com:443/RC0402FR-072M2L-Yageo-datasheet-103092701.pdf?src-supplier=Upverter, ComponentLink3URL=https://datasheet.octopart.com:443/RC0402FR-072M2L-Yageo-datasheet-103092701.pdf?src-supplier=Upverter, ComponentLink4Description=https://datasheet.octopart.com:443/RC0402FR-072M2L-Yageo-Group-datasheet-190305687.pdf?src-supplier=Future+Electronics, ComponentLink4URL=https://datasheet.octopart.com:443/RC0402FR-072M2L-Yageo-Group-datasheet-190305687.pdf?src-supplier=Future+Electronics, ComponentLink5Description=https://datasheet.octopart.com:443/RC0402FR-072M2L-Yageo-datasheet-164759695.pdf?src-supplier=Future+Electronics, ComponentLink5URL=https://datasheet.octopart.com:443/RC0402FR-072M2L-Yageo-datasheet-164759695.pdf?src-supplier=Future+Electronics, ComponentLink6Description=https://datasheet.octopart.com:443/RC0402FR-072M2L-Yageo-datasheet-137700087.pdf?src-supplier=Future+Electronics, ComponentLink6URL=https://datasheet.octopart.com:443/RC0402FR-072M2L-Yageo-datasheet-137700087.pdf?src-supplier=Future+Electronics, ComponentLink7Description=https://datasheet.octopart.com:443/RC0402FR-072M2L-Yageo-datasheet-12531192.pdf?src-supplier=Future+Electronics, ComponentLink7URL=https://datasheet.octopart.com:443/RC0402FR-072M2L-Yageo-datasheet-12531192.pdf?src-supplier=Future+Electronics, ComponentLink8Description=https://datasheet.octopart.com:443/RC0402FR-072M2L-Yageo-datasheet-10408619.pdf?src-supplier=element14+APAC, ComponentLink8URL=https://datasheet.octopart.com:443/RC0402FR-072M2L-Yageo-datasheet-10408619.pdf?src-supplier=element14+APAC, ComponentLink9Description=https://datasheet.octopart.com:443/RC0402FR-072M2L-Yageo-datasheet-62067350.pdf?src-supplier=element14+APAC, ComponentLink9URL=https://datasheet.octopart.com:443/RC0402FR-072M2L-Yageo-datasheet-62067350.pdf?src-supplier=element14+APAC, ComponentLink10Description=https://datasheet.octopart.com:443/RC0402FR-072M2L-Yageo-datasheet-148775077.pdf?src-supplier=JRH+Electronics, ComponentLink10URL=https://datasheet.octopart.com:443/RC0402FR-072M2L-Yageo-datasheet-148775077.pdf?src-supplier=JRH+Electronics, ComponentLink11Description=https://datasheet.octopart.com/RC0402FR-072M2L-Yageo-datasheet-73766026.pdf, ComponentLink11URL=https://datasheet.octopart.com/RC0402FR-072M2L-Yageo-datasheet-73766026.pdf, ComponentLink12Description=http://sigma.octopart.com:80/conflict_mineral_statement/Yageo-company-3.pdf?src-supplier=Compliance+Statements, ComponentLink12URL=http://sigma.octopart.com:80/conflict_mineral_statement/Yageo-company-3.pdf?src-supplier=Compliance+Statements, ComponentLink13Description=http://sigma.octopart.com:80/rohs_statement/Yageo-company-2.pdf?src-supplier=Compliance+Statements, ComponentLink13URL=http://sigma.octopart.com:80/rohs_statement/Yageo-company-2.pdf?src-supplier=Compliance+Statements, Composition="Thick Film", Depth=500µm, Features="Moisture Resistant", Height=350µm, Lead Free="Lead Free", Length=1mm, Lifecycle Status=Production, Manufacturer Part Number=RC0402FR-072M2L, Military Standard=Not, Mounting Technology="Surface Mount", Number of Terminals=2, Number of Terminations=2, Packaging="Cut Tape", Pins=2, Power Rating=63mW, Pricing="1=0.1, 10=0.005, 25=0.0044, 50=0.0032 (USD)", REACH SVHC=Yes, RoHS=Compliant, Schedule B="8533210045, 8533210045|8533210045, 8533210045|8533210045|8533210045, 8533210045|8533210045|8533210045|8533210045|8533210045|8533210045|8533210045|8533210045|8533210045|8533210045|8533210045|8533210045|8533210045|8533210045|8533210045|8533210045|8533210045|8533210045|8533210045|8533210045|8533210045|8533210045|8533210045|85", Stock=257023, Supplier=DigiKey, Termination=SMD/SMT, Voltage Rating (AC)=50V, Voltage Rating (DC)=50V, Width=500µm, Working Voltage=50V
R7 R8 R9 R10: library part RC0402FR-0726K7L, "Res Thick Film 0402 26.7K Ohm 1% 1/16W ±100ppm/°C Molded SMD Paper T/R", Case Code (Imperial)=0402, Case Code (Metric)=1005, Manufacturer="Yageo Group", Max Operating Temperature=155°C, Max Power Dissipation=63mW, Min Operating Temperature=-55°C, Power Dissipation=62.5mW, Supplier Part Number=49AK1374, Temperature Coefficient=100ppm/°C, Tolerance=1%, Voltage Rating=50V, Case/Package=0402, Category="Chip SMD Resistors", China RoHS=Non-Compliant, ComponentLink1Description=https://datasheet.octopart.com:443/RC0402FR-0726K7L-Yageo-datasheet-175887523.pdf?src-supplier=Newark, ComponentLink1URL=https://datasheet.octopart.com:443/RC0402FR-0726K7L-Yageo-datasheet-175887523.pdf?src-supplier=Newark, ComponentLink2Description=https://datasheet.octopart.com:443/RC0402FR-0726K7L-Yageo-datasheet-103092701.pdf?src-supplier=Upverter, ComponentLink2URL=https://datasheet.octopart.com:443/RC0402FR-0726K7L-Yageo-datasheet-103092701.pdf?src-supplier=Upverter, ComponentLink3Description=https://datasheet.octopart.com:443/RC0402FR-0726K7L-Yageo-Group-datasheet-189192902.pdf?src-supplier=TME, ComponentLink3URL=https://datasheet.octopart.com:443/RC0402FR-0726K7L-Yageo-Group-datasheet-189192902.pdf?src-supplier=TME, ComponentLink4Description=https://datasheet.octopart.com:443/RC0402FR-0726K7L-Yageo-Group-datasheet-176638170.pdf?src-supplier=TME, ComponentLink4URL=https://datasheet.octopart.com:443/RC0402FR-0726K7L-Yageo-Group-datasheet-176638170.pdf?src-supplier=TME, ComponentLink5Description=https://datasheet.octopart.com:443/RC0402FR-0726K7L-Yageo-datasheet-10408619.pdf?src-supplier=_legacy+Avnet, ComponentLink5URL=https://datasheet.octopart.com:443/RC0402FR-0726K7L-Yageo-datasheet-10408619.pdf?src-supplier=_legacy+Avnet, ComponentLink6Description=https://datasheet.octopart.com:443/RC0402FR-0726K7L-Yageo-datasheet-164759695.pdf?src-supplier=Future+Electronics, ComponentLink6URL=https://datasheet.octopart.com:443/RC0402FR-0726K7L-Yageo-datasheet-164759695.pdf?src-supplier=Future+Electronics, ComponentLink7Description=https://datasheet.octopart.com:443/RC0402FR-0726K7L-Yageo-datasheet-137700087.pdf?src-supplier=Future+Electronics, ComponentLink7URL=https://datasheet.octopart.com:443/RC0402FR-0726K7L-Yageo-datasheet-137700087.pdf?src-supplier=Future+Electronics, ComponentLink8Description=https://datasheet.octopart.com:443/RC0402FR-0726K7L-Yageo-datasheet-12531192.pdf?src-supplier=Future+Electronics, ComponentLink8URL=https://datasheet.octopart.com:443/RC0402FR-0726K7L-Yageo-datasheet-12531192.pdf?src-supplier=Future+Electronics, ComponentLink9Description=https://datasheet.octopart.com:443/RC0402FR-0726K7L-Yageo-datasheet-8324527.pdf?src-supplier=Future+Electronics, ComponentLink9URL=https://datasheet.octopart.com:443/RC0402FR-0726K7L-Yageo-datasheet-8324527.pdf?src-supplier=Future+Electronics, ComponentLink10Description=https://datasheet.octopart.com/RC0402FR-0726K7L-Yageo-datasheet-73766026.pdf, ComponentLink10URL=https://datasheet.octopart.com/RC0402FR-0726K7L-Yageo-datasheet-73766026.pdf, ComponentLink11Description=http://sigma.octopart.com:80/conflict_mineral_statement/Yageo-company-3.pdf?src-supplier=Compliance+Statements, ComponentLink11URL=http://sigma.octopart.com:80/conflict_mineral_statement/Yageo-company-3.pdf?src-supplier=Compliance+Statements, ComponentLink12Description=http://sigma.octopart.com:80/rohs_statement/Yageo-company-2.pdf?src-supplier=Compliance+Statements, ComponentLink12URL=http://sigma.octopart.com:80/rohs_statement/Yageo-company-2.pdf?src-supplier=Compliance+Statements, Composition="Thick Film", Contact Plating=Tin, Depth=500µm, Features="Moisture Resistant", Height=350µm, Lead Free="Lead Free", Length=1mm, Lifecycle Status=Production, Manufacturer Part Number=RC0402FR-0726K7L, Military Standard=Not, Mounting Technology="Surface Mount", Number of Terminals=2, Number of Terminations=2, Power Rating=63mW, Pricing="1=0.1, 25=0.009, 100=0.006, 500=0.005, 2500=0.004 (USD)", REACH SVHC=Yes, RoHS=Compliant, Schedule B="8533210045, 8533210045|8533210045, 8533210045|8533210045|8533210045, 8533210045|8533210045|8533210045|8533210045", Stock=5473, Supplier=Avnet, Termination=SMD/SMT, Voltage Rating (DC)=50V, Width=500µm, Working Voltage=50V
R15 R16 R17 R18 R19 R20 R21 R22 R23 R24 R25 R33 R35 R36 R37 R38 R39: library part RC0402JR-070RL, "GENERAL PURPOSE CHIP RESISTOR Metal Glaze/thick Film, 0.0625W, 0ohm, Surface Mount, 0402", Case Code (Imperial)=0402, Manufacturer="Yageo Group", Max Operating Temperature=155°C, Max Power Dissipation=63mW, Min Operating Temperature=-55°C, Power Dissipation=62.5mW, Supplier Part Number=311-0.0JRCT-ND, Temperature Coefficient=200ppm/°C, Tolerance=5%, Voltage Rating=50V, Case/Package=0402, Category="Chip SMD Resistors", China RoHS=Non-Compliant, ComponentLink1Description=https://datasheet.octopart.com:443/RC0402JR-070RL-Yageo-datasheet-182189538.pdf?src-supplier=IHS, ComponentLink1URL=https://datasheet.octopart.com:443/RC0402JR-070RL-Yageo-datasheet-182189538.pdf?src-supplier=IHS, ComponentLink2Description=https://datasheet.octopart.com:443/RC0402JR-070RL-Yageo-datasheet-10408619.pdf?src-supplier=Newark, ComponentLink2URL=https://datasheet.octopart.com:443/RC0402JR-070RL-Yageo-datasheet-10408619.pdf?src-supplier=Newark, ComponentLink3Description=https://datasheet.octopart.com:443/RC0402JR-070RL-Yageo-Group-datasheet-181964826.pdf?src-supplier=Newark, ComponentLink3URL=https://datasheet.octopart.com:443/RC0402JR-070RL-Yageo-Group-datasheet-181964826.pdf?src-supplier=Newark, ComponentLink4Description=https://datasheet.octopart.com:443/RC0402JR-070RL-Yageo-datasheet-12531192.pdf?src-supplier=Seeed+Studio, ComponentLink4URL=https://datasheet.octopart.com:443/RC0402JR-070RL-Yageo-datasheet-12531192.pdf?src-supplier=Seeed+Studio, ComponentLink5Description=https://datasheet.octopart.com:443/RC0402JR-070RL-Yageo-datasheet-8324527.pdf?src-supplier=TME, ComponentLink5URL=https://datasheet.octopart.com:443/RC0402JR-070RL-Yageo-datasheet-8324527.pdf?src-supplier=TME, ComponentLink6Description=https://datasheet.octopart.com:443/RC0402JR-070RL-Yageo-datasheet-62067350.pdf?src-supplier=Farnell, ComponentLink6URL=https://datasheet.octopart.com:443/RC0402JR-070RL-Yageo-datasheet-62067350.pdf?src-supplier=Farnell, ComponentLink7Description=https://datasheet.octopart.com:443/RC0402JR-070RL-Yageo-datasheet-8329306.pdf?src-supplier=element14, ComponentLink7URL=https://datasheet.octopart.com:443/RC0402JR-070RL-Yageo-datasheet-8329306.pdf?src-supplier=element14, ComponentLink8Description=https://datasheet.octopart.com:443/RC0402JR-070RL-Yageo-datasheet-505231.pdf?src-supplier=element14, ComponentLink8URL=https://datasheet.octopart.com:443/RC0402JR-070RL-Yageo-datasheet-505231.pdf?src-supplier=element14, ComponentLink9Description=https://datasheet.octopart.com:443/RC0402JR-070RL-Yageo-datasheet-175423674.pdf?src-supplier=SOS+electronic, ComponentLink9URL=https://datasheet.octopart.com:443/RC0402JR-070RL-Yageo-datasheet-175423674.pdf?src-supplier=SOS+electronic, ComponentLink10Description=https://datasheet.octopart.com:443/RC0402JR-070RL-Yageo-datasheet-164759695.pdf?src-supplier=Future+Electronics, ComponentLink10URL=https://datasheet.octopart.com:443/RC0402JR-070RL-Yageo-datasheet-164759695.pdf?src-supplier=Future+Electronics, ComponentLink11Description=https://datasheet.octopart.com:443/RC0402JR-070RL-Yageo-datasheet-137700087.pdf?src-supplier=Future+Electronics, ComponentLink11URL=https://datasheet.octopart.com:443/RC0402JR-070RL-Yageo-datasheet-137700087.pdf?src-supplier=Future+Electronics, ComponentLink12Description=https://datasheet.octopart.com/RC0402JR-070RL-Yageo-datasheet-73766026.pdf, ComponentLink12URL=https://datasheet.octopart.com/RC0402JR-070RL-Yageo-datasheet-73766026.pdf, ComponentLink13Description=http://sigma.octopart.com:80/conflict_mineral_statement/Yageo-company-3.pdf?src-supplier=Compliance+Statements, ComponentLink13URL=http://sigma.octopart.com:80/conflict_mineral_statement/Yageo-company-3.pdf?src-supplier=Compliance+Statements, ComponentLink14Description=http://sigma.octopart.com:80/rohs_statement/Yageo-company-2.pdf?src-supplier=Compliance+Statements, ComponentLink14URL=http://sigma.octopart.com:80/rohs_statement/Yageo-company-2.pdf?src-supplier=Compliance+Statements, Composition="Thick Film", Contact Plating=Tin, Depth=500µm, Features="Moisture Resistant", Height=350µm, Lead Free="Lead Free", Length=1mm, Lifecycle Status=Production, Manufacturer Part Number=RC0402JR-070RL, Military Standard=Not, Mounting Technology="Surface Mount", Number of Terminals=2, Number of Terminations=2, Packaging="Tape & Reel", Pins=2, Power Rating=63mW, Pricing="1=0.1, 10=0.010, 25=0.0064, 50=0.0054, 100=0.0047, 250=0.00392, 500=0.00346, 1000=0.00304, 5000=0.0023 (USD)", Radiation Hardening=No, REACH SVHC=Yes, RoHS=Compliant, Schedule B="8533290000, 8533290000|8533290000, 8533290000|8533290000|8533290000, 8533290000|8533290000|8533290000|8533290000", Stock=15603665, Supplier=DigiKey, Termination=SMD/SMT, Voltage Rating (DC)=50V, Width=500µm
R26 R27 R29: library part ERJ-2RKF2400X, "Res Thick Film 0402 240 Ohm 1% 0.1W ±100ppm/°C Molded SMD Punched Carrier T/R", Case Code (Imperial)=0402, Case Code (Metric)=1005, Manufacturer=Panasonic, Manufacturer Lifecycle Status=ACTIVE, Max Operating Temperature=155°C, Max Power Dissipation=100mW, Min Operating Temperature=-55°C, Power Rating=63mW, Supplier Part Number=P240LCT-ND, Temperature Coefficient=100ppm/°C, Tolerance=1%, Voltage Rating=50V, Case/Package=0402, Category="Chip SMD Resistors", China RoHS=Non-Compliant, ComponentLink1Description=https://datasheet.octopart.com:443/ERJ-2RKF2400X-Panasonic-datasheet-82288794.pdf?src-supplier=Panasonic, ComponentLink1URL=https://datasheet.octopart.com:443/ERJ-2RKF2400X-Panasonic-datasheet-82288794.pdf?src-supplier=Panasonic, ComponentLink2Description=https://datasheet.octopart.com:443/ERJ-2RKF2400X-Panasonic-datasheet-48891056.pdf?src-supplier=Upverter, ComponentLink2URL=https://datasheet.octopart.com:443/ERJ-2RKF2400X-Panasonic-datasheet-48891056.pdf?src-supplier=Upverter, ComponentLink3Description=https://datasheet.octopart.com:443/ERJ-2RKF2400X-Panasonic-datasheet-13266541.pdf?src-supplier=Farnell, ComponentLink3URL=https://datasheet.octopart.com:443/ERJ-2RKF2400X-Panasonic-datasheet-13266541.pdf?src-supplier=Farnell, ComponentLink4Description=https://datasheet.octopart.com:443/ERJ-2RKF2400X-Panasonic-datasheet-10025800.pdf?src-supplier=Farnell, ComponentLink4URL=https://datasheet.octopart.com:443/ERJ-2RKF2400X-Panasonic-datasheet-10025800.pdf?src-supplier=Farnell, ComponentLink5Description=https://datasheet.octopart.com:443/ERJ-2RKF2400X-Panasonic-datasheet-8853621.pdf?src-supplier=Farnell, ComponentLink5URL=https://datasheet.octopart.com:443/ERJ-2RKF2400X-Panasonic-datasheet-8853621.pdf?src-supplier=Farnell, ComponentLink6Description=https://datasheet.octopart.com:443/ERJ-2RKF2400X-Panasonic-datasheet-136608610.pdf?src-supplier=Farnell, ComponentLink6URL=https://datasheet.octopart.com:443/ERJ-2RKF2400X-Panasonic-datasheet-136608610.pdf?src-supplier=Farnell, ComponentLink7Description=https://datasheet.octopart.com:443/ERJ2RKF2400X-Panasonic---ECG-datasheet-15994758.pdf?src-supplier=Farnell, ComponentLink7URL=https://datasheet.octopart.com:443/ERJ2RKF2400X-Panasonic---ECG-datasheet-15994758.pdf?src-supplier=Farnell, ComponentLink8Description=https://datasheet.octopart.com:443/ERJ-2RKF2400X-Panasonic-datasheet-5313456.pdf?src-supplier=Newark, ComponentLink8URL=https://datasheet.octopart.com:443/ERJ-2RKF2400X-Panasonic-datasheet-5313456.pdf?src-supplier=Newark, ComponentLink9Description=https://datasheet.octopart.com:443/ERJ-2RKF2400X-Panasonic-datasheet-154766169.pdf?src-supplier=Master+Electronics, ComponentLink9URL=https://datasheet.octopart.com:443/ERJ-2RKF2400X-Panasonic-datasheet-154766169.pdf?src-supplier=Master+Electronics, ComponentLink10Description=https://datasheet.octopart.com:443/ERJ2RKF2400X-Panasonic-datasheet-188592431.pdf?src-supplier=TME, ComponentLink10URL=https://datasheet.octopart.com:443/ERJ2RKF2400X-Panasonic-datasheet-188592431.pdf?src-supplier=TME, ComponentLink11Description=https://datasheet.octopart.com:443/ERJ2RKF2400X-Panasonic-datasheet-164353789.pdf?src-supplier=TME, ComponentLink11URL=https://datasheet.octopart.com:443/ERJ2RKF2400X-Panasonic-datasheet-164353789.pdf?src-supplier=TME, ComponentLink12Description=https://datasheet.octopart.com/ERJ-2RKF2400X-Panasonic-datasheet-78375410.pdf, ComponentLink12URL=https://datasheet.octopart.com/ERJ-2RKF2400X-Panasonic-datasheet-78375410.pdf, ComponentLink13Description=https://datasheet.octopart.com:443/ERJ-2RKF2400X-Panasonic-datasheet-41391857.pdf?src-supplier=Electro+Sonic, ComponentLink13URL=https://datasheet.octopart.com:443/ERJ-2RKF2400X-Panasonic-datasheet-41391857.pdf?src-supplier=Electro+Sonic, Composition="Thick Film", Contact Plating=Tin, Depth=500µm, Features="Automotive AEC-Q200", Height=350µm, Lead Free="Lead Free", Length=1mm, Lifecycle Status=Production, Manufacturer Part Number=ERJ-2RKF2400X, Military Standard=Not, Mounting Technology="Surface Mount", Number of Terminals=2, Number of Terminations=2, Packaging="Tape and Reel", Part Series="Precision Thick Film Chip Resistors", Pins=2, Power Dissipation=100mW, Pricing="1=0.1, 10=0.028, 25=0.0208, 50=0.0168, 100=0.0138, 250=0.01072, 500=0.009, 1000=0.00766, 5000=0.00554 (USD)", Radiation Hardening=No, REACH SVHC=Yes, RoHS=Compliant, Schedule B="8533210045, 8533210045|8533210045|8533210045|8533210045|8533210045|8533210045|8533210045|8533210045|8533210045|8533210045|8533210045|8533210045|8533210045|8533210045|8533210045|8533210045|8533210045|8533210045|8533210045|8533210045|8533210045|8533210045|8533210045|85", Stock=1919536, Supplier=DigiKey, Termination=SMD/SMT, Voltage Rating (DC)=50V, Width=500µm, Working Voltage=50V